# Altium PCB Retain-PCB.PcbDoc
Units mm, origin at the board's own origin, x right, y up, seen from the top; angles counter-clockwise.
Board outline 91.5 x 85 mm, 2 copper layers (Top Layer, Bottom Layer); 7 components, 8 nets, 64 pads, 4 vias.
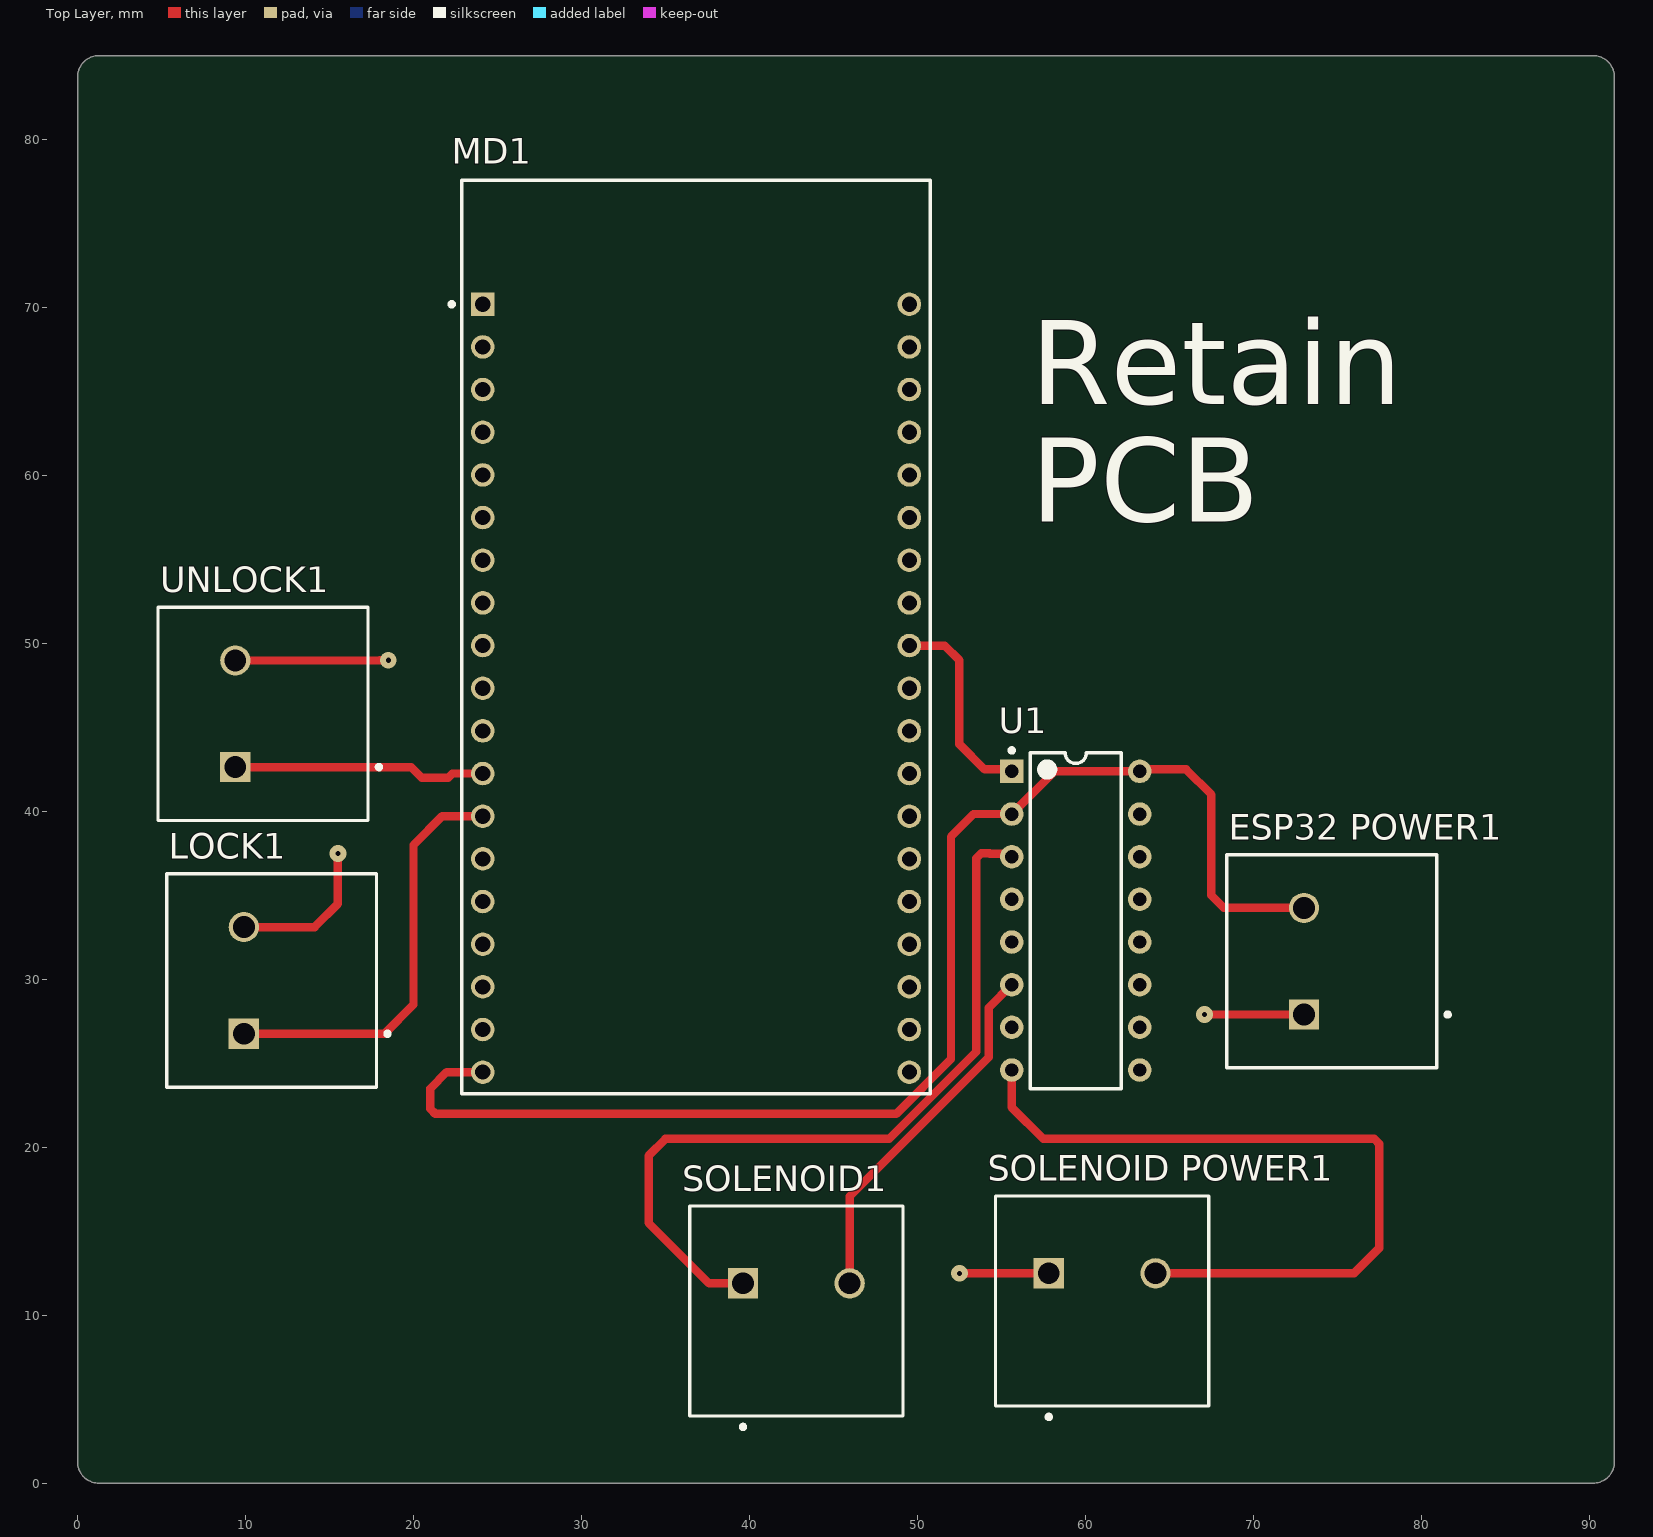
[diagram p0: Top Layer view]
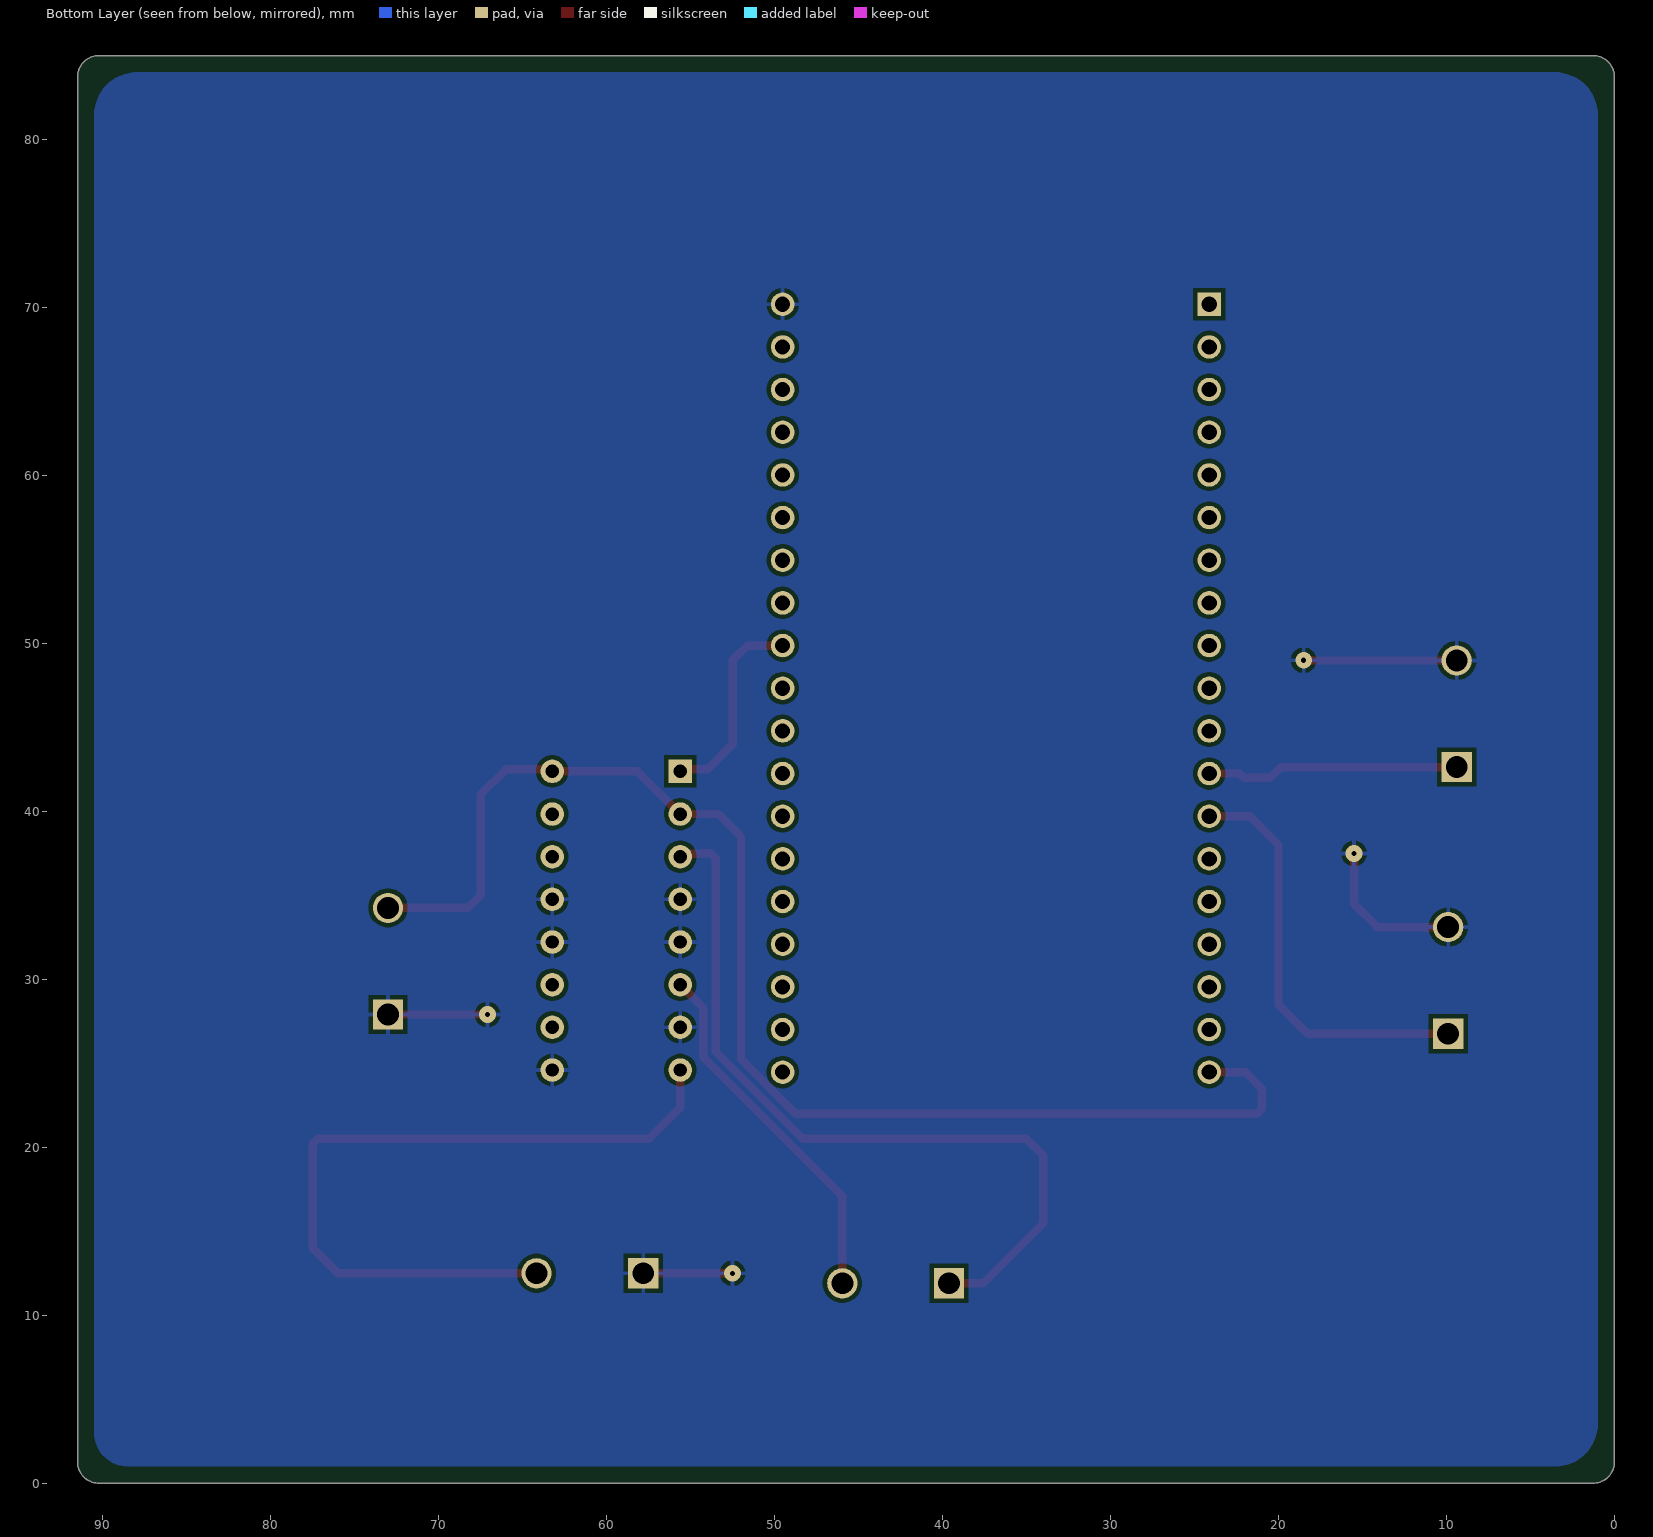
[diagram p1: Bottom Layer view, seen from below]
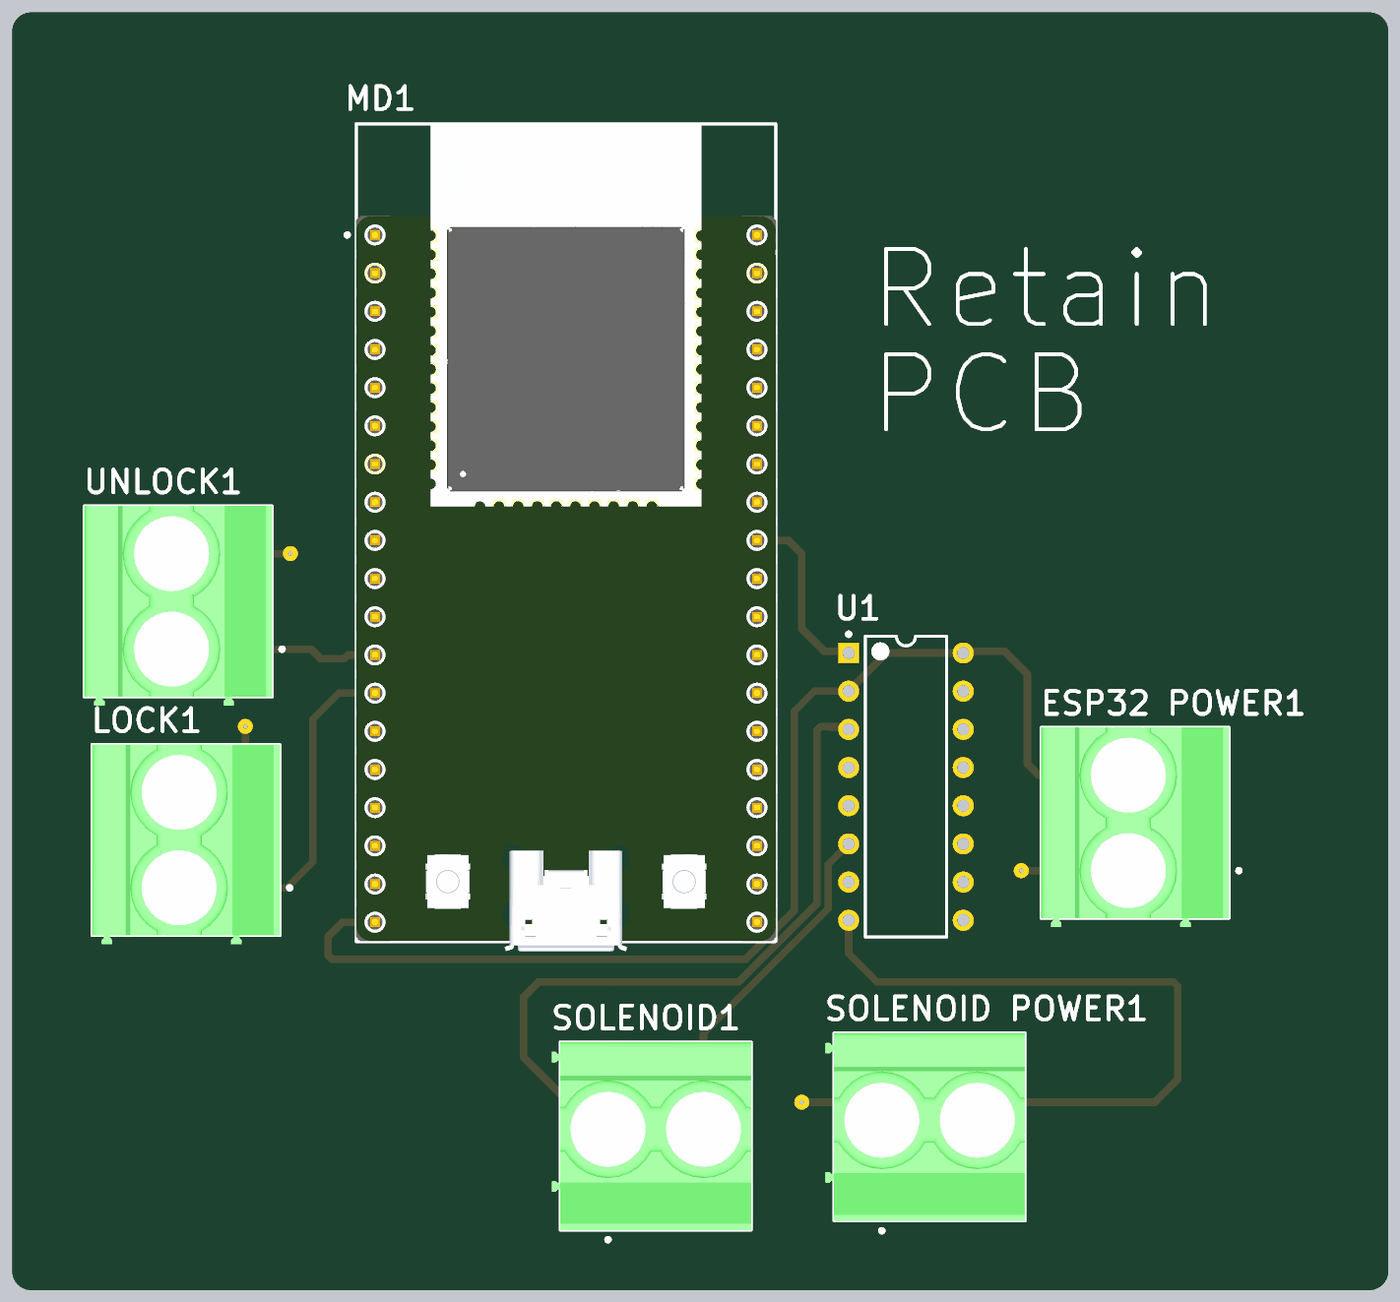
[diagram p2: 3D render of the assembled board from above, using the file's embedded part models]

## Layer stack, top to bottom
Top Solder: solder mask 0.0102, Solder Resist, Dk 3.5
Top Layer: signal copper 0.0356
Dielectric 1: dielectric 0.32, FR-4, Dk 4.8
Bottom Layer: signal copper 0.0356
Bottom Solder: solder mask 0.0102, Solder Resist, Dk 3.5

## Board outline
0,1.27 0,83.73 cw(c1.27,83.73) 1.27,85 90.23,85 cw(c90.23,83.73) 91.5,83.73 91.5,1.27 cw(c90.23,1.27) 90.23,0 1.27,0 cw(c1.27,1.27)

## Design rules (kind name [scope] priority, off if disabled: settings)
AssemblyTestPointUsage [All] p1: isadvanced=TRUE
AssemblyTestpoint [All] p1: isadvanced=TRUE testpointundercomponent=TRUE minsize=1.016 maxsize=2.54 preferedsize=1.524 minholesize=0 maxholesize=1.016 preferedholesize=0.813 testpointgrid=0.025 usegrid=TRUE gridtolerance=0 allowsidetop=TRUE allowsidebottom=TRUE
Clearance Clearance_1 [OnMid vs OnMid] p1: gap=0.254 ignorepadtopadclearanceinfootprint=FALSE sourcerule=40 cellrowname=All cellrowtype=0 cellcolname=All cellcoltype=0 innerlayers=TRUE
Clearance Clearance_2 [(ExistsOnLayer('Top Layer') Or ExistsOnLayer('Bottom Layer')) vs (ExistsOnLayer('Top Layer') Or ExistsOnLayer('Bottom Layer'))] p2: gap=0.254 ignorepadtopadclearanceinfootprint=FALSE sourcerule=40 cellrowname=All cellrowtype=0 cellcolname=All cellcoltype=0 outerlayers=TRUE
Clearance [All] p3: gap=0.254 ignorepadtopadclearanceinfootprint=FALSE ismatrix=TRUE
ComponentClearance [All] p1: isadvanced=TRUE gap=0.254 collisioncheckmode=3 verticalgap=0.254 showdistances=FALSE
FabricationTestPointUsage [All] p1: isadvanced=TRUE valid=0 allowmultiple=FALSE
FabricationTestpoint [All] p1: isadvanced=TRUE side=3 testpointundercomponent=TRUE minsize=1.016 maxsize=2.54 preferedsize=1.524 minholesize=0 maxholesize=1.016 preferedholesize=0.813 testpointgrid=0.025 allowsidetop=TRUE allowsidebottom=TRUE usegrid=TRUE gridtolerance=0
FanoutControl Fanout_BGA [IsBGA] p1: isadvanced=TRUE bgadir=Out bgaviamode=Centered fanoutstyle=Auto fanoutdirection=Alternating viagrid=0.025 // Fanout_BGA (Default Rule)
FanoutControl Fanout_LCC [IsLCC] p2: isadvanced=TRUE bgadir=Out bgaviamode=Centered fanoutstyle=Auto fanoutdirection=Alternating viagrid=0.025 // Fanout_LCC (Default Rule)
FanoutControl Fanout_SOIC [IsSOIC] p3: isadvanced=TRUE bgadir=Out bgaviamode=Centered fanoutstyle=Auto fanoutdirection=Alternating viagrid=0.025 // Fanout_SOIC (Default Rule)
FanoutControl Fanout_Small [(CompPinCount < 5)] p4: isadvanced=TRUE bgadir=Out bgaviamode=Centered fanoutstyle=Auto fanoutdirection=OutThenIn viagrid=0.025 // Fanout_Small (Default Rule)
FanoutControl Fanout_Default [All] p5: isadvanced=TRUE bgadir=Out bgaviamode=Centered fanoutstyle=Auto fanoutdirection=Alternating viagrid=0.025 // Fanout_Default (Default Rule)
Height [All] p1: isadvanced=TRUE minheight=0 maxheight=25.4 prefheight=12.7
HoleSize [All] p1: isadvanced=TRUE absolutevalues=TRUE maxlimit=2.54 minlimit=0.025 maxpercent=80.000 minpercent=20.000
HoleToHoleClearance [All] p1: isadvanced=TRUE gap=0.254 allowstackedmicrovias=TRUE
LayerPairs [All] p1: isadvanced=TRUE enforce=TRUE
MinimumSolderMaskSliver [All] p1: isadvanced=TRUE minsoldermaskwidth=0.254
NetAntennae [All] p1: isadvanced=TRUE netantennaetolerance=0
PasteMaskExpansion [All] p1: isadvanced=TRUE expansion=0
PlaneClearance [All] p1: isadvanced=TRUE clearance=0.508
PlaneConnect [All] p1: isadvanced=TRUE planeconnectstyle=Relief reliefexpansion=0.508 reliefentries=4 reliefconductorwidth=0.254 reliefairgap=0.254
PolygonConnect [All] p1: connectstyle=Relief reliefconductorwidth=0.254 reliefentries=4 polygonreliefangle="90 Angle" airgapwidth=0.254
RoutingCorners [All] p1: isadvanced=TRUE cornerstyle=45-Degree minsetback=2.54 maxsetback=2.54
RoutingPriority [All] p1: isadvanced=TRUE routingpriority=0
RoutingVias [All] p1: holewidth=0.711 width=1.27 viastyle="Through Hole" minholewidth=0.711 minwidth=1.27 maxholewidth=0.711 maxwidth=1.27
ShortCircuit [All] p1: isadvanced=TRUE allowed=FALSE
SilkToSilkClearance [All] p1: isadvanced=TRUE silktosilkclearance=0.254
SilkToSolderMaskClearance [IsPad] p1: isadvanced=TRUE minsilkscreentomaskgap=0.254 clearancetoexposedcopper=TRUE
SolderMaskExpansion [All] p1: isadvanced=TRUE expansion=0 istentingtop=FALSE
SupplyNets "Schematic Supply Nets_2" [InNet('+9V')] p1: isadvanced=TRUE voltage=0.000
SupplyNets "Schematic Supply Nets_1" [InNet('GND')] p2: isadvanced=TRUE voltage=0.000
SupplyNets "Schematic Supply Nets" [InNet('+5V')] p3: isadvanced=TRUE voltage=0.000
UnRoutedNet [All] p1: isadvanced=TRUE
UnpouredPolygon [All] p1: isadvanced=TRUE
Width MaxMinWidth_1 [All] p1: isadvanced=TRUE maxlimit=0.5 minlimit=0.254 preferedwidth=0.3 minimp=50.000000 maximp=50.000000 favimp=50.000000
Width [All] p2: maxlimit=0.254 minlimit=0.254 preferedwidth=0.254
4 further rules are at their usual default settings.

## Components (designator, comment, footprint, x,y, rotation, side; value= is the part's Value field where it differs from the comment)
"ESP32 POWER1" "1714955" PHOE-1714955_V 73.018,31.08 r90 top
LOCK1 "1714955" PHOE-1714955_V 9.899,29.937 r90 top
MD1 "ESP32-DevKitC V4" FP-ESP32-DevKitC_V4-MFG 36.823,50.384 r0 top
SOLENOID1 "1714955" PHOE-1714955_V 42.792,11.903 r0 top
"SOLENOID POWER1" "1714955" PHOE-1714955_V 61,12.5 r0 top
U1 "L293D" STM-L293D-16 59.429,33.493 r0 top
UNLOCK1 "1714955" PHOE-1714955_V 9.391,45.812 r90 top

## Footprints (in the part's own frame and the unit in brackets; to place one, negate y for a bottom-side part, rotate by r counter-clockwise, add the part's x,y. Pads: shape width x height; smd on the part's side, far side on the other; paste and mask are expansions set on the pad)
FP-ESP32-DevKitC_V4-MFG [mm]
  rect 1.4x1.4 hole 0.9 paste-2539.97 mask+0: 1(-12.7,19.81)
  round 1.4 hole 0.9 paste-2539.97 mask+0: 2(-12.7,17.27) 3(-12.7,14.73) 4(-12.7,12.19) 5(-12.7,9.65) 6(-12.7,7.11) 7(-12.7,4.57) 8(-12.7,2.03) 9(-12.7,-0.51) 10(-12.7,-3.05) 11(-12.7,-5.59) 12(-12.7,-8.13) 13(-12.7,-10.67) 14(-12.7,-13.21) 15(-12.7,-15.75) 16(-12.7,-18.29) 17(-12.7,-20.83) 18(-12.7,-23.37) 19(-12.7,-25.91) 20(12.7,-25.91) 21(12.7,-23.37) 22(12.7,-20.83) 23(12.7,-18.29) 24(12.7,-15.75) 25(12.7,-13.21) 26(12.7,-10.67) 27(12.7,-8.13) 28(12.7,-5.59) 29(12.7,-3.05) 30(12.7,-0.51) 31(12.7,2.03) 32(12.7,4.57) 33(12.7,7.11) 34(12.7,9.65) 35(12.7,12.19) 36(12.7,14.73) 37(12.7,17.27) 38(12.7,19.81)
  silkscreen extent -14.67,-27.2 13.95,27.2, body extent -14.05,-27.3 14.05,27.3, height 0.25
PHOE-1714955_V [mm] "Terminal Block, 2-Leads, Body 12.7x12.5mm, Pitch 6.35mm"
  rect 1.8x1.8 hole 1.3: 1(-3.175,0)
  round 1.8 hole 1.3: 2(3.175,0)
  silkscreen extent -6.35,-8.68 6.35,4.6, body extent -6.92,-7.9 6.35,4.6, height 21.51
STM-L293D-16 [mm] "DIP, 16-Leads, Body 20x6.85mm, Pitch 2.54mm"
  rect 1.4x1.4 hole 0.8: 1(-3.81,8.89)
  round 1.4 hole 0.8: 2(-3.81,6.35) 3(-3.81,3.81) 4(-3.81,1.27) 5(-3.81,-1.27) 6(-3.81,-3.81) 7(-3.81,-6.35) 8(-3.81,-8.89) 9(3.81,-8.89) 10(3.81,-6.35) 11(3.81,-3.81) 12(3.81,-1.27) 13(3.81,1.27) 14(3.81,3.81) 15(3.81,6.35) 16(3.81,8.89)
  silkscreen extent -3.93,-10 2.7,10.26, body extent -3.93,-10 3.93,10, height 5.1

## Part data
"ESP32 POWER1" LOCK1 SOLENOID1 "SOLENOID POWER1" UNLOCK1: library part CMP-2000-05797-1, "PC Terminal Block, Pitch 6.35 mm, 1 x 2 Position, Height 21.5 mm, Tail Lenght 5.1 mm, RoHS, Bulk", Manufacturer="Phoenix Contact", Package Description="PC Terminal Block, Pitch 6.35 mm, 1 x 2 Position, Height 21.5 mm, Tail Lenght 5.1 mm", Datasheet URL=http://media.digikey.com/pdf/Data%20Sheets/Phoenix%20Contact%20PDFs/1714955.pdf, Datasheet Version=02/2010, Manufacturer URL=http://www.phoenixcontact.com/, Mounting Technology=ThroughHole, Package Reference=1714955
MD1: library part CMP-194065-000004-1, "WiFi Development Tools (802.11) ESP32 General Development Kit, ESP32-WROOM-32 on the board", Manufacturer=Espressif, Max Frequency=2.5GHz, Max Supply Voltage=5V, Min Supply Voltage=2.7V, Temperature="-40°C to", Temperature Range Low=-40°C, Automotive=No, Bandwidth=2.4-2.5GHz, Category=UNK, ComponentLink2Description=Datasheet, ComponentLink2URL=https://docs.espressif.com/projects/esp-idf/en/latest/get-started/get-started-devkitc.html, Device Class L1="Integrated Circuits (ICs)", Device Class L2="RF Semiconductors and Devices", Device Class L3=Transceivers, Interface=I2C,SPI,UART,I2S, Lead Free=Yes, Manufacturer Part Number="ESP32-DevKitC V4", Number Of Adc Channels=16, Number Of Gpio=22, Octopart=https://octopart.com/esp32-devkitc+v4-espressif+systems-107467262, Package="ESP32-DevKitC V4", RoHS=TRUE
U1: library part CMP-2000-06524-1, "Push-Pull Four Channel Driver with Diode, 4.5 to 36 V, -40 to 150 degC, 16-Pin PDIP, RoHS, Tube", Current - Output / Channel=600mA, Current - Peak Output=1.2A, Manufacturer=STMicroelectronics, On-State Resistance=-, Operating Temperature=-40°C~150°C, Package / Case="16-DIP(0.300\",7.62mm)", Package Description="16-Pin Thru-Hole Dual-In-Line, Body 20 x 6.85 mm, Pitch 2.54 mm", Package Reference=DIP-16, Standard Package=25, Supplier Device Package=16-PowerDIP, Voltage - Supply=4.5V~36V, Category=IntegratedCircuits(ICs), Datasheet URL=http://www.st.com/st-web-ui/static/active/en/resource/technical/document/datasheet/CD00000059.pdf, Datasheet Version=07/2003, Dynamic Catalog=HalfBridge, Family=PMIC-MOSFET,BridgeDrivers-InternalSwitch, Input Type=Non-Inverting, Manufacturer URL=http://www.st.com/, Mounting Technology=ThroughHole, Mounting Type=ThroughHole, Number of Outputs=4, Other Names=497-2936-5, Other Related Documents=L293DViewAllSpecifications, Packaging=Tube, PartNumber=L293D, Series=-, Type=HalfBridge

## Via types
v1: diameter 1, hole 0.3, Top Layer to Bottom Layer, 4 vias

## Nets (pads, with @x,y where several pads share a name; then routed paths per layer and width w, separated by ;. In a path a pad name is that pad's centre, name@x,y a point inside that pad or via, vN(x,y) a via of type N, cw(c..) or ccw(c..) an arc to the next point about the centre after c; other vN are vias at no path point)
+5V: "ESP32 POWER1.2" MD1.19 U1.2 U1.16 | length 80.1
  Top Layer w0.5: MD1.19 21.974,24.474 21,23.5 21,22.293 21.293,22 48.752,22 52,25.248 52,38.5 53.343,39.843 U1.2 58.159,42.383 U1.16 63.356,42.5 66,42.5 67.5,41 67.5,35 68.245,34.255 73.018,34.255
+9V: "SOLENOID POWER1.2" U1.8 | length 45.2
  Top Layer w0.5: U1.8 55.619,22.381 57.5,20.5 77.207,20.5 77.5,20.207 77.5,14 76,12.5 64.175,12.5
GND: "ESP32 POWER1.1" "SOLENOID POWER1.1" LOCK1.2 MD1.38 U1.4 U1.5 U1.7 U1.9 U1.12 U1.13 UNLOCK1.2 | length 29.7
  Top Layer w0.5: UNLOCK1.2 17.987,48.987 18,49 v1(18.5,49) ; LOCK1.2 14.112,33.112 15.5,34.5 v1(15.5,37.5) ; v1(52.5,12.5) 57.825,12.5 ; v1@67,28 v1(67.095,27.905) 73.018,27.905
NetLOCK1_1: LOCK1.1 MD1.13 | length 25.2
  Top Layer w0.5: LOCK1.1 18.262,26.762 20,28.5 20,38 21.714,39.714 MD1.13
NetMD1_12: MD1.12 UNLOCK1.1 | length 15.1
  Top Layer w0.5: UNLOCK1.1 19.863,42.637 20.5,42 22.063,42 22.317,42.254 MD1.12
NetMD1_30: MD1.30 U1.1 | length 12.1
  Top Layer w0.5: MD1.30 51.626,49.874 52.5,49 52.5,44 54,42.5 55.502,42.5 U1.1
NetSOLENOID1_1: SOLENOID1.1 U1.3 | length 47
  Top Layer w0.5: SOLENOID1.1 37.597,11.903 34,15.5 34,19.5 35,20.5 48.318,20.5 53.5,25.682 53.5,37.207 53.793,37.5 54.293,37.5 54.318,37.475 55.447,37.475 U1.3
NetSOLENOID1_2: SOLENOID1.2 U1.6 | length 21.8
  Top Layer w0.5: SOLENOID1.2 45.967,17.083 54.254,25.37 54.254,28.318 U1.6
pads on no net: MD1.1 MD1.2 MD1.3 MD1.4 MD1.5 MD1.6 MD1.7 MD1.8 MD1.9 MD1.10 MD1.11 MD1.14 MD1.15 MD1.16 MD1.17 MD1.18 MD1.20 MD1.21 MD1.22 MD1.23 MD1.24 MD1.25 MD1.26 MD1.27 MD1.28 MD1.29 MD1.31 MD1.32 MD1.33 MD1.34 MD1.35 MD1.36 MD1.37 U1.10 U1.11 U1.14 U1.15

## Polygon pours and split planes (outlines as drawn)
GND on Bottom Layer "GND_L02_P000" (solid, pour order 0): 1,81.46 cw(c3.54,81.46) 3.54,84 87.96,84 cw(c87.96,81.46) 90.5,81.46 90.5,3 cw(c88.5,3) 88.5,1 3.54,1 cw(c3.54,3.54) 1,3.54 1,5

## Silkscreen, mask and mechanical layers (free items; w line width, h text height)
Top Overlay:
  text "Retain" at 56.754,64.254 h5
  text "PCB" at 56.754,57.254 h5
Mechanical 1:
  lines w0.254: 0,1.27 ccw(c1.27,1.27) 1.27,0 33.5,0 90.23,0 ccw(c90.23,1.27) 91.5,1.27 91.5,83.73 ccw(c90.23,83.73) 90.23,85 1.27,85 ccw(c1.27,83.73) 0,83.73 0,1.27